# Altium PCB pcb.PcbDoc (part 2 of 2)
Units mm, origin at the board's own origin, x right, y up, seen from the top; angles counter-clockwise.
Board outline 100 x 100 mm, 2 copper layers (Top Layer, Bottom Layer); 16 components, 50 nets, 301 pads, 580 vias.
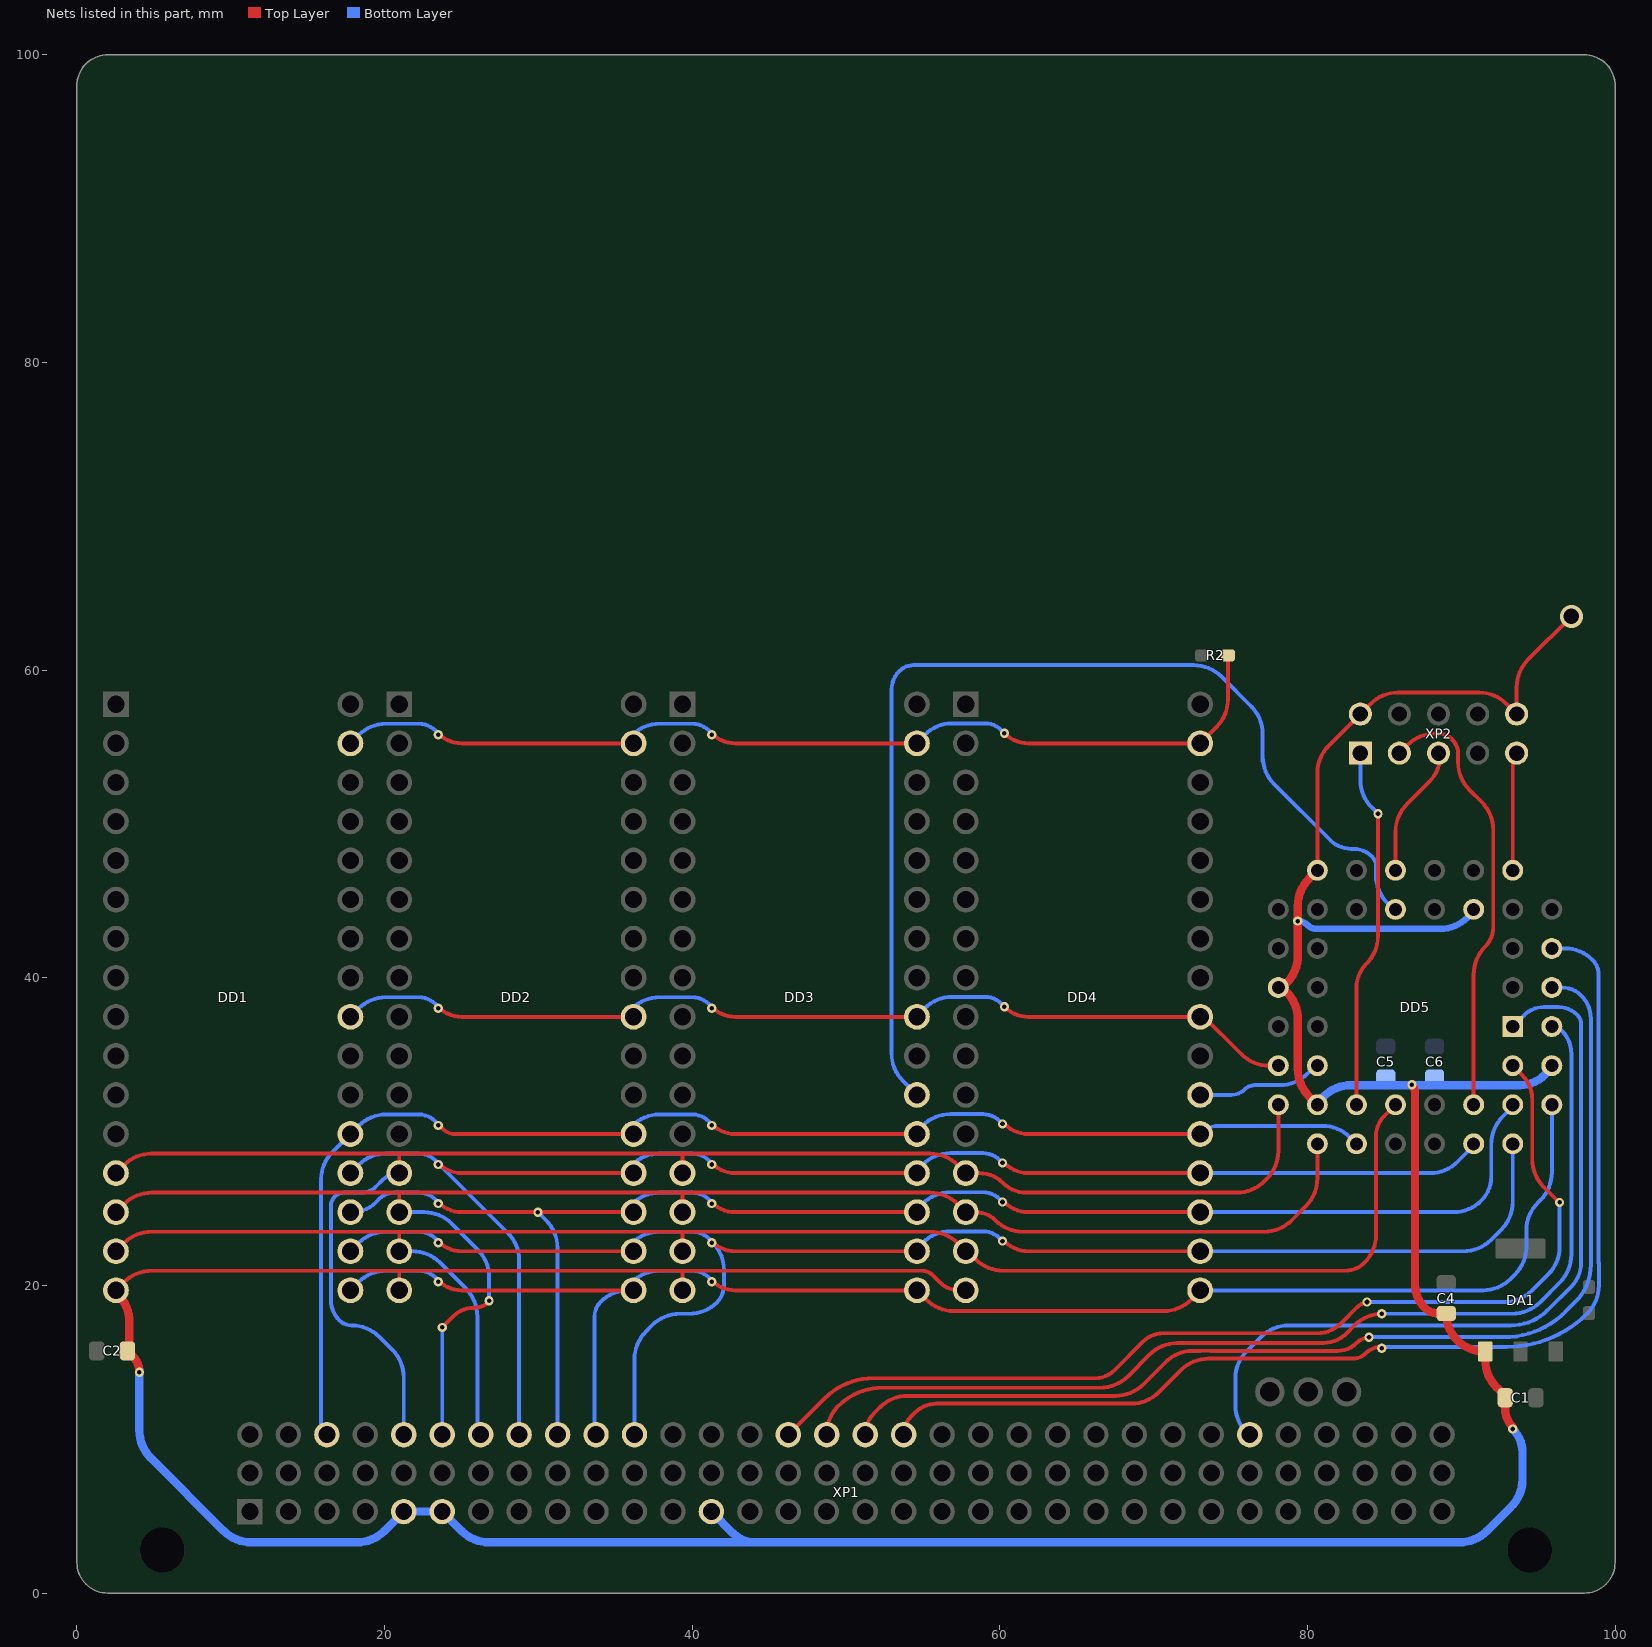
[diagram p2: the nets of this part, all layers, seen from the top]

## Via types
v1: diameter 1.5, hole 1, Top Layer to Bottom Layer, 513 vias
v2: diameter 0.6, hole 0.3, Top Layer to Bottom Layer, 67 vias

## Nets (pads, with @x,y where several pads share a name; then routed paths per layer and width w, separated by ;. In a path a pad name is that pad's centre, name@x,y a point inside that pad or via, vN(x,y) a via of type N, cw(c..) or ccw(c..) an arc to the next point about the centre after c; other vN are vias at no path point) (continued)
CS2: DD3.22 DD5.14 | length 70
  Bottom Layer w0.254: DD3.22@54.61,32.385 53.703,33.292 cw(c55.499,35.088) 52.959,35.088 52.959,58.718 cw(c54.693,58.718) 53.467,59.944 cw(c54.387,59.024) 54.387,60.325 72.608,60.325 cw(c72.608,57.785) 74.404,59.581 76.345,57.64 cw(c74.549,55.844) 77.089,55.844 77.089,54.392 ; 77.089,54.102 77.089,54.392 ; DD5.14@85.598,44.45 85.199,44.849 cw(c86.995,46.645) 84.455,46.645 84.455,47.266 ccw(c83.588,47.266) 84.201,47.879 ccw(c82.975,46.653) 82.975,48.387 82.829,48.387 cw(c82.829,50.288) 81.485,48.944 77.833,52.596 cw(c79.629,54.392) 77.089,54.392
CS3: DD4.22 DD5.27 | length 8.3
  Bottom Layer w0.254: DD4.22@73.025,32.385 75.026,32.385 ccw(c75.026,33.686) 75.946,32.766 cw(c76.559,32.153) 76.559,33.02 78.196,33.02 ccw(c78.196,35.56) 79.992,33.764 DD5.27@80.645,34.417
D0: DD1.13 DD2.13 DD3.13 DD4.13 DD5.28 XP1.C5 | length 105
  Top Layer w0.254: DD1.13@3.066,27.831 cw(c4.862,26.035) 4.862,28.575 20.955,28.575 ; DD2.13@20.955,27.305 20.955,28.575 ; DD3.13@39.37,27.305 39.37,28.575 ; DD4.13@57.259,27.831 ccw(c55.463,26.035) 55.463,28.575 39.37,28.575 ; DD4.13@57.785,27.305 58.665,27.305 cw(c58.665,25.137) 60.198,26.67 ccw(c61.731,28.203) 60.199,26.669 ccw(c61.731,28.203) 61.731,26.035 75.402,26.035 ccw(c75.402,28.575) 77.198,26.779 77.361,26.942 ccw(c75.565,28.738) 78.105,28.738 DD5.28@78.105,31.75 ; 20.955,28.575 39.37,28.575
  Bottom Layer w0.254: DD2.13@20.955,27.305 ccw(c20.955,25.772) 19.871,26.856 19.431,26.416 cw(c18.511,27.336) 18.511,26.035 17.377,26.035 ccw(c17.377,25.168) 16.764,25.781 ccw(c17.377,25.168) 16.51,25.168 16.51,19.074 ccw(c18.408,19.074) 17.066,17.732 ccw(c17.871,18.538) 17.871,17.399 cw(c17.871,14.859) 19.667,16.655 20.506,15.816 cw(c18.71,14.02) 21.25,14.02 XP1.C5@21.25,10.3
D1: DD1.14 DD2.14 DD3.14 DD4.14 DD5.29 XP1.C6 | length 104.4
  Top Layer w0.254: DD1.14@3.066,25.291 cw(c4.862,23.495) 4.862,26.035 20.955,26.035 ; DD2.14@20.955,24.765 20.955,26.035 ; v2(23.749,17.272) 24.48,18.003 cw(c25.781,16.702) 25.781,18.542 ccw(c25.781,20.075) v2@26.865,18.991 ; DD3.14@39.37,24.765 39.37,26.035 ; DD4.14@57.259,25.291 ccw(c55.463,23.495) 55.463,26.035 39.37,26.035 ; DD4.14@57.785,24.765 58.438,24.765 cw(c58.438,22.969) 59.708,24.239 ccw(c61.504,26.035) 61.504,23.495 77.18,23.495 ccw(c77.18,26.035) 78.976,24.239 79.901,25.164 ccw(c78.105,26.96) 80.645,26.96 DD5.29@80.645,29.21 ; 20.955,26.035 39.37,26.035
  Bottom Layer w0.254: DD2.14@20.955,24.765 22.57,24.765 cw(c22.57,22.225) 24.366,24.021 26.053,22.334 cw(c24.257,20.538) 26.797,20.538 v2@26.797,19.177 ; v2(23.749,17.272) 23.75,17.271 XP1.C6@23.75,10.3
  other v2: 26.797,18.999
D2: DD1.15 DD2.15 DD3.15 DD4.15 DD5.34 XP1.C7 | length 109.6
  Top Layer w0.254: DD1.15@3.066,22.751 cw(c4.862,20.955) 4.862,23.495 20.955,23.495 ; DD2.15@20.955,22.225 20.955,23.495 ; DD3.15@39.37,22.225 39.37,23.495 ; DD4.15@57.259,22.751 ccw(c55.463,20.955) 55.463,23.495 39.37,23.495 ; DD4.15@57.785,22.352 58.438,21.699 ccw(c60.234,23.495) 60.234,20.955 82.441,20.955 ccw(c82.441,22.751) 83.711,21.481 ccw(c81.915,23.277) 84.455,23.277 84.455,29.718 cw(c86.295,29.718) 84.994,31.019 DD5.34@85.725,31.75 ; 20.955,23.495 39.37,23.495
  Bottom Layer w0.254: DD2.15@20.955,22.225 21.808,22.225 cw(c21.808,19.685) 23.604,21.481 25.291,19.794 cw(c23.495,17.998) 26.035,17.998 XP1.C7@26.035,10.16
D3: DD1.17 DD2.17 DD3.17 DD4.17 DD5.40 XP1.C10 | length 99.3
  Top Layer w0.254: v2@23.495,20.32 ccw(c25.028,21.853) 25.028,19.685 DD2.17@36.195,19.685 ; v2@41.275,20.32 ccw(c42.808,21.853) 42.808,19.685 DD3.17@53.975,19.685 ; DD3.17@54.61,19.685 55.212,19.083 ccw(c57.008,20.879) 57.008,18.339 70.652,18.339 ccw(c70.652,20.879) 72.448,19.083 DD4.17@73.076,19.71
  Bottom Layer w0.254: DD1.17@18.306,20.211 cw(c20.102,18.415) 20.102,20.955 22.225,20.955 cw(c22.225,19.422) 23.309,20.506 ; XP1.C10@33.655,10.287 33.655,17.978 cw(c35.017,17.978) 34.054,18.941 cw(c35.85,17.145) 35.85,19.685 DD2.17@36.195,19.685 ; DD2.17@36.086,20.211 cw(c37.882,18.415) 37.882,20.955 40.005,20.955 cw(c40.005,19.422) 41.089,20.506 ; DD4.17@73.025,19.685 91.404,19.685 ccw(c91.404,22.225) 93.2,20.429 93.49,20.719 ccw(c91.694,22.515) 94.234,22.515 94.234,23.586 cw(c96.774,23.586) 94.978,25.382 95.141,25.545 ccw(c93.345,27.341) 95.885,27.341 DD5.40@95.885,31.75
  other v2: 23.495,20.244 41.275,20.244
D4: DD1.18 DD2.18 DD3.18 DD4.18 DD5.39 XP1.C11 | length 97.7
  Top Layer w0.254: v2@23.495,22.86 ccw(c25.028,24.393) 25.028,22.225 DD2.18@36.195,22.225 ; v2@41.275,22.86 ccw(c42.808,24.393) 42.808,22.225 DD3.18@53.975,22.225 ; DD3.18@54.61,22.225 DD3.18@54.777,22.225 ; v2@60.325,22.86 ccw(c61.858,24.393) 61.858,22.225 DD4.18@73.025,22.225 ; DD4.18@72.575,21.699 DD4.18@73.101,22.225
  Bottom Layer w0.254: DD1.18@18.306,22.751 cw(c20.102,20.955) 20.102,23.495 22.225,23.495 cw(c22.225,21.962) 23.309,23.046 ; DD2.18@36.086,22.751 cw(c37.882,20.955) 37.882,23.495 40.005,23.495 cw(c40.005,21.962) 41.089,23.046 ; XP1.C11@36.25,10.3 36.25,15.208 cw(c38.79,15.208) 36.994,17.004 37.407,17.417 cw(c39.203,15.621) 39.203,18.161 39.816,18.161 ccw(c39.816,20.701) 41.613,18.905 ccw(c40.527,19.991) 42.062,19.991 42.062,21.02 ccw(c39.522,21.02) 41.318,22.817 v2@41.275,22.86 ; DD3.18@54.984,22.776 cw(c56.78,20.98) 56.78,23.52 58.903,23.52 cw(c58.903,21.987) v2@59.987,23.071 ; DD4.18@73.025,22.225 90.134,22.225 ccw(c90.134,24.765) 91.93,22.969 92.601,23.64 ccw(c90.805,25.436) 93.345,25.436 DD5.39@93.345,29.21
  other v2: 23.495,22.784 41.275,22.784 60.173,22.885
D5: DD1.19 DD2.19 DD3.19 DD4.19 DD5.41 XP1.C9 | length 95.1
  Top Layer w0.254: v2@23.495,25.4 ccw(c25.028,26.933) 25.028,24.765 v2(29.972,24.765) DD2.19@36.195,24.765 ; v2@41.275,25.4 ccw(c42.808,26.933) 42.808,24.765 DD3.19@53.975,24.765 ; v2@60.325,25.4 ccw(c61.858,26.933) 61.858,24.765 DD4.19@73.025,24.765
  Bottom Layer w0.254: DD1.19@17.78,24.765 17.898,24.765 ccw(c17.898,26.933) 19.431,25.4 19.685,25.654 ; 19.685,25.654 cw(c20.605,24.734) 20.605,26.035 22.225,26.035 cw(c22.225,24.502) 23.309,25.586 ; v2(29.972,24.765) 30.498,24.239 cw(c28.702,22.443) 31.242,22.443 31.242,22.225 ; XP1.C9@31.242,10.414 31.242,22.062 ; DD2.19@36.086,25.291 cw(c37.882,23.495) 37.882,26.035 40.005,26.035 cw(c40.005,24.502) 41.089,25.586 ; DD3.19@54.984,25.316 cw(c56.78,23.52) 56.78,26.06 58.903,26.06 cw(c58.903,24.527) v2@59.987,25.611 ; DD4.19@73.025,24.765 89.499,24.765 ccw(c89.499,27.305) 91.295,25.509 ccw(c89.718,27.086) 91.948,27.086 91.948,29.174 cw(c94.488,29.174) 92.692,30.97 DD5.41@93.345,31.623
  other v2: 23.495,25.324 41.275,25.324 60.173,25.425
D6: DD1.20 DD2.20 DD3.20 DD4.20 DD5.37 XP1.C8 | length 92.7
  Top Layer w0.254: v2@23.495,27.94 ccw(c25.028,29.473) 25.028,27.305 DD2.20@36.195,27.305 ; v2@41.275,27.94 ccw(c42.808,29.473) 42.808,27.305 DD3.20@53.975,27.305 ; v2@60.325,27.94 ccw(c61.858,29.473) 61.858,27.305 DD4.20@73.025,27.305
  Bottom Layer w0.254: DD1.20@18.306,27.831 cw(c20.102,26.035) 20.102,28.575 22.225,28.575 cw(c22.225,27.042) 23.309,28.126 ; v2@23.495,27.94 28.006,23.429 cw(c26.21,21.633) 28.75,21.633 XP1.C8@28.75,10.3 ; DD2.20@36.086,27.831 cw(c37.882,26.035) 37.882,28.575 40.005,28.575 cw(c40.005,27.042) 41.089,28.126 ; DD3.20@54.984,27.856 cw(c56.78,26.06) 56.78,28.6 58.903,28.6 cw(c58.903,27.067) v2@59.987,28.151 ; DD4.20@73.025,27.305 87.975,27.305 ccw(c87.975,29.845) 89.771,28.049 DD5.37@90.805,29.083
  other v2: 23.495,27.864 41.275,27.864 60.173,27.965
D7: DD1.21 DD2.21 DD3.21 DD4.21 DD5.31 XP1.C3 | length 85.1
  Top Layer w0.254: v2@23.495,30.48 23.823,30.152 ccw(c24.564,30.892) 24.564,29.845 DD2.21@35.56,29.845 ; v2@41.275,30.48 ccw(c42.808,32.013) 42.808,29.845 DD3.21@53.975,29.845 ; v2@60.325,30.48 ccw(c61.858,32.013) 61.858,29.845 DD4.21@73.025,29.845
  Bottom Layer w0.254: XP1.C3@15.875,10.16 15.983,10.268 15.983,10.945 15.875,11.053 15.875,26.888 cw(c18.415,26.888) 16.619,28.684 DD1.21@17.78,29.845 ; DD1.21@18.306,30.371 cw(c20.102,28.575) 20.102,31.115 22.225,31.115 cw(c22.225,29.582) 23.309,30.666 ; DD2.21@36.086,30.371 cw(c37.882,28.575) 37.882,31.115 40.005,31.115 cw(c40.005,29.582) 41.089,30.666 ; DD3.21@54.984,30.396 cw(c56.78,28.6) 56.78,31.14 58.903,31.14 cw(c58.903,29.607) v2@59.987,30.691 ; DD4.21@73.025,29.87 cw(c74.251,28.644) 74.251,30.378 80.964,30.378 cw(c80.964,27.838) 82.761,29.634 DD5.31@83.185,29.21
  other v2: 23.495,30.404 41.275,30.404 60.173,30.505
GND: C1.2 C2.2 C4.2 C5.2 C6.2 DA1.1 DD1.16 DD2.16 DD3.16 DD4.16 DD5.10 DD5.17 DD5.22 DD5.30 DD5.42 XP1.A5 XP1.A6 XP1.A13 XP2.2 XP2.10 | length 269.8
  Top Layer w0.254: DD1.16@3.066,20.211 cw(c4.862,18.415) 4.862,20.955 20.955,20.955 ; DD2.16@20.955,19.685 20.955,20.955 ; DD3.16@39.37,19.685 39.37,20.955 ; DD4.16@57.785,19.685 57.371,19.685 cw(c57.371,21.506) 56.083,20.218 55.634,20.668 ccw(c54.94,19.974) 54.94,20.955 39.37,20.955 ; DD5.17@80.645,46.99 80.645,53.304 cw(c83.185,53.304) 81.389,55.1 XP2.2@83.439,57.15 84.092,57.803 cw(c85.888,56.007) 85.888,58.547 91.15,58.547 cw(c91.15,56.007) 92.946,57.803 XP2.10@93.599,57.15 93.599,58.892 cw(c96.139,58.892) 94.343,60.688 v1(97.155,63.5) ; 20.955,20.955 39.37,20.955
  Top Layer w0.54: DD1.16@2.54,19.685 2.54,19.558 2.669,19.429 cw(c0.873,17.633) 3.413,17.633 3.413,15.988 3.286,15.861 C2.2@3.286,15.748 ; C2.2@3.413,15.637 3.615,15.435 cw(c2.531,14.351) v2(4.064,14.351) ; DD5.22@78.631,39.098 cw(c76.835,37.302) 79.375,37.302 79.375,34.072 ccw(c81.915,34.072) 80.119,32.276 ; DD5.22@78.631,39.642 ccw(c76.835,41.438) 79.375,41.438 v2(79.375,43.688) 79.375,44.668 cw(c81.915,44.668) 80.119,46.464 ; v2@86.766,33.045 cw(c86.215,32.494) 86.995,32.494 86.995,20.075 ccw(c89.163,20.075) 87.63,18.542 ccw(c88.511,19.423) 88.511,18.177 C4.2@89.027,18.177 89.027,18.129 ccw(c91.403,18.129) 89.723,16.449 ccw(c91.519,18.245) 91.519,15.705 DA1.1@91.563,15.705 91.563,15.153 ccw(c94.103,15.153) 92.307,13.357 C1.2@92.837,12.827 ; C1.2@92.853,12.7 92.853,11.983 ccw(c94.533,11.983) v2@93.345,10.795
  Bottom Layer w0.254: DD5.22@78.631,39.098 78.359,39.37 DD5.22@78.631,39.642
  Bottom Layer w0.42: v2(79.375,43.688) cw(c79.375,42.768) 80.025,43.419 ccw(c80.601,43.995) 80.601,43.18 88.61,43.18 ccw(c88.61,45.72) 90.406,43.924 DD5.10@90.805,44.323
  Bottom Layer w0.54: v2(4.064,14.351) 4.064,10.577 ccw(c6.604,10.577) 4.808,8.781 9.543,4.046 ccw(c11.339,5.842) 11.339,3.302 18.2,3.302 ccw(c18.2,5.842) 19.996,4.046 XP1.A5@21.25,5.3 23.632,5.3 cw(c23.632,5.243) XP1.A6@23.673,5.283 ; XP1.A6@23.75,5.3 25.004,4.046 ccw(c26.8,5.842) 26.8,3.302 28.194,3.302 ; 28.197,3.302 44.069,3.302 ; XP1.A13@41.25,5.3 42.667,3.883 ccw(c44.069,5.284) 44.069,3.302 ; DD5.30@80.645,31.877 81.044,32.276 cw(c82.84,30.48) 82.84,33.02 93.817,33.02 ccw(c93.817,35.253) 95.396,33.674 DD5.42@95.885,34.163 ; v2@93.351,10.662 cw(c91.834,9.144) 93.98,9.144 93.98,7.402 cw(c91.44,7.402) 93.236,5.606 91.676,4.046 cw(c89.88,5.842) 89.88,3.302 44.069,3.302
  other v2: 93.345,10.668 86.792,33.045
IORQ: DD5.44 XP1.C16 | length 69.1
  Top Layer w0.254: XP1.C16@48.75,10.3 48.75,10.36 cw(c51.29,10.36) 49.494,12.156 cw(c52.376,9.274) 52.376,13.35 66.527,13.35 ccw(c66.527,15.89) 68.323,14.094 69.741,15.512 cw(c71.537,13.716) 71.537,16.256 72.216,16.256 72.23,16.271 81.053,16.271 ccw(c81.053,18.388) 82.549,16.89 83.076,17.417 cw(c84.872,15.621) 84.872,18.161 v2(84.836,18.161)
  Bottom Layer w0.254: v2(84.836,18.161) 93.309,18.161 ccw(c93.309,20.701) 95.105,18.905 96.411,20.211 ccw(c94.615,22.007) 97.155,22.007 97.155,35.065 ccw(c95.04,35.065) 96.535,36.561 ccw(c95.885,35.91) DD5.44@95.885,36.83
MREQ: DD5.43 XP1.C15 | length 68
  Top Layer w0.254: XP1.C15@46.25,10.3 48.604,12.654 cw(c51.781,9.476) 51.781,13.97 66.211,13.97 ccw(c66.211,15.704) 67.437,14.478 69.311,16.352 cw(c70.612,15.051) 70.612,16.891 80.636,16.891 ccw(c80.636,19.059) 82.169,17.526 83.225,18.582 cw(c84.049,17.758) v2@84.049,18.923 ; DD5.43@93.345,34.29 93.95,33.685 cw(c92.346,32.08) 94.615,32.08 94.615,28.205 ccw(c97.155,28.205) 95.359,26.409 v2@96.368,25.4
  Bottom Layer w0.254: v2@84.023,18.923 92.801,18.923 ccw(c92.801,21.463) 94.597,19.667 95.649,20.719 ccw(c93.853,22.515) 96.393,22.515 v2(96.393,25.4)
  other v2: 83.871,18.923
OE: DD1.24 DD2.24 DD3.24 DD4.24 DD5.26 | length 60.8
  Top Layer w0.254: v2@23.495,38.1 ccw(c25.028,39.633) 25.028,37.465 DD2.24@36.195,37.465 ; v2@41.275,38.1 ccw(c42.808,39.633) 42.808,37.465 DD3.24@53.975,37.465 ; v2@60.325,38.1 ccw(c61.858,39.633) 61.858,37.465 DD4.24@73.025,37.465 ; DD4.24@73.152,37.592 75.71,35.034 ccw(c77.506,36.83) 77.506,34.29 DD5.26@78.105,34.29
  Bottom Layer w0.254: DD1.24@18.306,37.991 cw(c20.102,36.195) 20.102,38.735 22.225,38.735 cw(c22.225,37.202) 23.309,38.286 ; DD2.24@36.086,37.991 cw(c37.882,36.195) 37.882,38.735 40.005,38.735 cw(c40.005,37.202) 41.089,38.286 ; DD3.24@55.111,38.016 cw(c56.907,36.22) 56.907,38.76 59.03,38.76 cw(c59.03,37.227) v2@60.114,38.311
  other v2: 23.495,38.024 41.275,38.024 60.3,38.125
RD: DD5.2 XP1.C17 | length 71.7
  Top Layer w0.254: XP1.C17@51.25,10.3 cw(c53.225,10.3) 51.828,11.696 52.215,12.083 cw(c54.011,10.287) 54.011,12.827 ; 53.975,12.827 67.528,12.827 ccw(c67.528,15.367) 69.324,13.571 70.757,15.004 cw(c72.553,13.208) 72.553,15.748 73.016,15.748 73.026,15.758 73.728,15.758 73.738,15.748 81.959,15.748 ccw(c81.959,17.482) 83.185,16.256 cw(c84.105,15.336) v2@84.105,16.637
  Bottom Layer w0.254: 84.328,16.637 92.77,16.637 ccw(c92.77,22.318) 96.787,18.301 97.437,18.951 ccw(c95.052,21.336) 98.425,21.336 98.425,37.329 ccw(c96.257,37.329) 97.79,38.862 ccw(c96.564,37.636) 96.564,39.37 DD5.2@95.885,39.37
  other v2: 83.998,16.637
RES: DD5.1 XP1.C27 | length 51.2
  Bottom Layer w0.254: XP1.C27@76.2,10.287 76.055,10.432 cw(c77.851,12.228) 75.311,12.228 75.311,13.97 cw(c77.764,13.97) 76.029,15.704 76.98,16.655 cw(c78.776,14.859) 78.776,17.399 93.211,17.399 ccw(c93.211,20.787) 95.607,18.391 97.155,19.939 ccw(c95.622,21.472) 97.79,21.472 97.79,36.979 ccw(c96.923,36.979) 97.536,37.592 ccw(c96.31,36.366) 96.31,38.1 95.377,38.1 ccw(c95.377,36.26) 94.076,37.561 DD5.1@93.345,36.83
TCK: DD5.32 XP2.1 | length 23.6
  Top Layer w0.254: DD5.32@83.185,31.75 83.185,39.361 cw(c85.353,39.361) 83.82,40.894 83.838,40.912 ccw(c82.042,42.708) 84.582,42.708 v2(84.582,50.673)
  Bottom Layer w0.254: XP2.1@83.439,54.61 83.439,52.868 ccw(c85.979,52.868) 84.183,51.072 v2(84.582,50.673)
TDI: DD5.7 XP2.9 | length 7.8
  Top Layer w0.254: DD5.7@93.345,46.99 93.345,54.124 cw(c94.212,54.124) XP2.9@93.599,54.737
TDO: DD5.38 XP2.3 | length 28.9
  Top Layer w0.254: XP2.3@85.979,54.61 86.505,55.136 cw(c88.301,53.34) 88.301,55.88 88.519,55.88 cw(c88.519,54.654) 89.386,55.521 89.408,55.499 ; 89.408,55.499 cw(c88.488,54.579) 89.789,54.579 89.789,54.011 ccw(c92.329,54.011) 90.533,52.215 91.331,51.417 cw(c89.535,49.621) 92.075,49.621 92.075,43.289 cw(c90.279,43.289) 91.549,42.019 ccw(c93.345,40.223) 90.805,40.223 DD5.38@90.805,31.75
TMS: DD5.13 XP2.5 | length 8.7
  Top Layer w0.254: DD5.13@85.725,46.99 85.725,49.494 cw(c88.265,49.494) 86.469,51.29 87.902,52.723 ccw(c86.106,54.519) 88.646,54.519 XP2.5@88.646,54.737
WE: DD1.31 DD2.31 DD3.31 DD4.31 R2.1 | length 60.9
  Top Layer w0.254: v2@23.495,55.88 ccw(c25.028,57.413) 25.028,55.245 DD2.31@36.195,55.245 ; v2@41.275,55.88 ccw(c42.808,57.413) 42.808,55.245 DD3.31@53.975,55.245 ; v2@60.325,55.88 ccw(c61.858,57.413) 61.858,55.245 DD4.31@73.025,55.245 74.084,56.304 ccw(c72.288,58.101) 74.828,58.101 R2.1@74.828,60.935
  Bottom Layer w0.254: DD1.31@18.306,55.771 cw(c20.102,53.975) 20.102,56.515 22.225,56.515 cw(c22.225,54.982) 23.309,56.066 ; DD2.31@36.086,55.771 cw(c37.882,53.975) 37.882,56.515 40.005,56.515 cw(c40.005,54.982) 41.089,56.066 ; DD3.31@55.111,55.796 cw(c56.907,54) 56.907,56.54 59.03,56.54 cw(c59.03,55.007) v2@60.114,56.091
  other v2: 23.495,55.804 41.275,55.804 60.3,55.905
WR: DD5.4 XP1.C18 | length 73.5
  Top Layer w0.254: XP1.C18@53.746,10.312 cw(c55.402,10.312) 54.231,11.483 54.483,11.735 cw(c55.893,10.324) 55.893,12.319 68.544,12.319 ccw(c68.544,14.859) 70.34,13.063 71.773,14.496 cw(c73.569,12.7) 73.569,15.24 82.922,15.24 ccw(c82.922,16.488) 83.805,15.606 cw(c84.762,14.649) 84.762,16.002 v2@84.836,16.002
  Bottom Layer w0.254: v2@84.836,16.002 92.933,16.002 ccw(c92.933,23.435) 98.171,18.161 ; DD5.4@95.885,41.91 96.738,41.91 cw(c96.738,39.37) 98.534,41.166 cw(c97.571,40.203) 98.933,40.203 98.933,21.463 ; 98.189,18.179 cw(c92.933,23.435) 98.171,18.161 ; 98.943,21.463 98.943,19.985 cw(c96.403,19.985) 98.199,18.189 98.171,18.161
  other v2: 84.836,15.926
pads on no net: DD5.5 DD5.36 XP1. XP1.A4 XP1.A7 XP1.A12 XP1.A14 XP1.A17 XP1.A18 XP1.A19 XP1.A25 XP1.A28 XP1.A29 XP1.A30 XP1.A31 XP1.A32 XP1.B1 XP1.B2 XP1.B3 XP1.B4 XP1.B5 XP1.B6 XP1.B7 XP1.B8 XP1.B9 XP1.B10 XP1.B11 XP1.B12 XP1.B13 XP1.B14 XP1.B15 XP1.B16 XP1.B17 XP1.B18 XP1.B19 XP1.B20 XP1.B21 XP1.B22 XP1.B23 XP1.B24 XP1.B25 XP1.B26 XP1.B27 XP1.B28 XP1.B29 XP1.B30 XP1.B31 XP1.B32 XP1.C4 XP1.C12 XP1.C13 XP1.C14 XP1.C19 XP1.C20 XP1.C21 XP1.C22 XP1.C23 XP1.C24 XP1.C28 XP1.C29 XP1.C30 XP1.C31 XP1.C32 XP2.6 XP2.7 XP2.8
copper on no net:
  other v1: 6.883,13.411 18.44,13.411 87.681,13.411 75.895,18.263 7.01,32.36 28.397,32.36 48.108,32.36 66.65,32.36 86.36,41.275 3.175,63.5 5.715,63.5 81.915,63.5 84.455,63.5 86.995,63.5 89.535,63.5 92.075,63.5 94.615,63.5 3.175,66.04 5.715,66.04 8.255,66.04 10.795,66.04 13.335,66.04 15.875,66.04 18.415,66.04 20.955,66.04 23.495,66.04 26.035,66.04 28.575,66.04 31.115,66.04 33.655,66.04 36.195,66.04 38.735,66.04 41.275,66.04 43.815,66.04 46.355,66.04 48.895,66.04 51.435,66.04 53.975,66.04 56.515,66.04 59.055,66.04 61.595,66.04 64.135,66.04 66.675,66.04 69.215,66.04 71.755,66.04 74.295,66.04 76.835,66.04 79.375,66.04 81.915,66.04 84.455,66.04 86.995,66.04 89.535,66.04 92.075,66.04 94.615,66.04 97.155,66.04 3.175,68.58 5.715,68.58 8.255,68.58 10.795,68.58 13.335,68.58 15.875,68.58 18.415,68.58 20.955,68.58 23.495,68.58 26.035,68.58 28.575,68.58 31.115,68.58 33.655,68.58 36.195,68.58 38.735,68.58 41.275,68.58 43.815,68.58 46.355,68.58 48.895,68.58 51.435,68.58 53.975,68.58 56.515,68.58 59.055,68.58 61.595,68.58 64.135,68.58 66.675,68.58 69.215,68.58 71.755,68.58 74.295,68.58 76.835,68.58 79.375,68.58 81.915,68.58 84.455,68.58 86.995,68.58 89.535,68.58 92.075,68.58 94.615,68.58 97.155,68.58 3.175,71.12 5.715,71.12 8.255,71.12 10.795,71.12 13.335,71.12 15.875,71.12 18.415,71.12 20.955,71.12 23.495,71.12 26.035,71.12 28.575,71.12 31.115,71.12 33.655,71.12 36.195,71.12 38.735,71.12 41.275,71.12 43.815,71.12 46.355,71.12 48.895,71.12 51.435,71.12 53.975,71.12 56.515,71.12 59.055,71.12 61.595,71.12 64.135,71.12 66.675,71.12 69.215,71.12 71.755,71.12 74.295,71.12 76.835,71.12 79.375,71.12 81.915,71.12 84.455,71.12 86.995,71.12 89.535,71.12 92.075,71.12 94.615,71.12 97.155,71.12 3.175,73.66 5.715,73.66 8.255,73.66 10.795,73.66 13.335,73.66 15.875,73.66 18.415,73.66 20.955,73.66 23.495,73.66 26.035,73.66 28.575,73.66 31.115,73.66 33.655,73.66 36.195,73.66 38.735,73.66 41.275,73.66 43.815,73.66 46.355,73.66 48.895,73.66 51.435,73.66 53.975,73.66 56.515,73.66 59.055,73.66 61.595,73.66 64.135,73.66 66.675,73.66 69.215,73.66 71.755,73.66 74.295,73.66 76.835,73.66 79.375,73.66 81.915,73.66 84.455,73.66 86.995,73.66 89.535,73.66 92.075,73.66 94.615,73.66 97.155,73.66 3.175,76.2 5.715,76.2 8.255,76.2 10.795,76.2 13.335,76.2 15.875,76.2 18.415,76.2 20.955,76.2 23.495,76.2 26.035,76.2 28.575,76.2 31.115,76.2 33.655,76.2 36.195,76.2 38.735,76.2 41.275,76.2 43.815,76.2 46.355,76.2 48.895,76.2 51.435,76.2 53.975,76.2 56.515,76.2 59.055,76.2 61.595,76.2 64.135,76.2 66.675,76.2 69.215,76.2 71.755,76.2 74.295,76.2 76.835,76.2 79.375,76.2 81.915,76.2 84.455,76.2 86.995,76.2 89.535,76.2 92.075,76.2 94.615,76.2 97.155,76.2 3.175,78.74 5.715,78.74 8.255,78.74 10.795,78.74 13.335,78.74 15.875,78.74 18.415,78.74 20.955,78.74 23.495,78.74 26.035,78.74 28.575,78.74 31.115,78.74 33.655,78.74 36.195,78.74 38.735,78.74 41.275,78.74 43.815,78.74 46.355,78.74 48.895,78.74 51.435,78.74 53.975,78.74 56.515,78.74 59.055,78.74 61.595,78.74 64.135,78.74 66.675,78.74 69.215,78.74 71.755,78.74 74.295,78.74 76.835,78.74 79.375,78.74 81.915,78.74 84.455,78.74 86.995,78.74 89.535,78.74 92.075,78.74 94.615,78.74 97.155,78.74 3.175,81.28 5.715,81.28 8.255,81.28 10.795,81.28 13.335,81.28 15.875,81.28 18.415,81.28 20.955,81.28 23.495,81.28 26.035,81.28 28.575,81.28 31.115,81.28 33.655,81.28 36.195,81.28 38.735,81.28 41.275,81.28 43.815,81.28 46.355,81.28 48.895,81.28 51.435,81.28 53.975,81.28 56.515,81.28 59.055,81.28 61.595,81.28 64.135,81.28 66.675,81.28 69.215,81.28 71.755,81.28 74.295,81.28 76.835,81.28 79.375,81.28 81.915,81.28 84.455,81.28 86.995,81.28 89.535,81.28 92.075,81.28 94.615,81.28 97.155,81.28 3.175,83.82 5.715,83.82 8.255,83.82 10.795,83.82 13.335,83.82 15.875,83.82 18.415,83.82 20.955,83.82 23.495,83.82 26.035,83.82 28.575,83.82 31.115,83.82 33.655,83.82 36.195,83.82 38.735,83.82 41.275,83.82 43.815,83.82 46.355,83.82 48.895,83.82 51.435,83.82 53.975,83.82 56.515,83.82 59.055,83.82 61.595,83.82 64.135,83.82 66.675,83.82 69.215,83.82 71.755,83.82 74.295,83.82 76.835,83.82 79.375,83.82 81.915,83.82 84.455,83.82 86.995,83.82 89.535,83.82 92.075,83.82 94.615,83.82 97.155,83.82 3.175,86.36 5.715,86.36 8.255,86.36 10.795,86.36 13.335,86.36 15.875,86.36 18.415,86.36 20.955,86.36 23.495,86.36 26.035,86.36 28.575,86.36 31.115,86.36 33.655,86.36 36.195,86.36 38.735,86.36 41.275,86.36 43.815,86.36 46.355,86.36 48.895,86.36 51.435,86.36 53.975,86.36 56.515,86.36 59.055,86.36 61.595,86.36 64.135,86.36 66.675,86.36 69.215,86.36 71.755,86.36 74.295,86.36 76.835,86.36 79.375,86.36 81.915,86.36 84.455,86.36 86.995,86.36 89.535,86.36 92.075,86.36 94.615,86.36 97.155,86.36 3.175,88.9 5.715,88.9 8.255,88.9 10.795,88.9 13.335,88.9 15.875,88.9 18.415,88.9 20.955,88.9 23.495,88.9 26.035,88.9 28.575,88.9 31.115,88.9 33.655,88.9 36.195,88.9 38.735,88.9 41.275,88.9 43.815,88.9 46.355,88.9 48.895,88.9 51.435,88.9 53.975,88.9 56.515,88.9 59.055,88.9 61.595,88.9 64.135,88.9 66.675,88.9 69.215,88.9 71.755,88.9 74.295,88.9 76.835,88.9 79.375,88.9 81.915,88.9 84.455,88.9 86.995,88.9 89.535,88.9 92.075,88.9 94.615,88.9 97.155,88.9 3.175,91.44 5.715,91.44 8.255,91.44 10.795,91.44 13.335,91.44 15.875,91.44 18.415,91.44 20.955,91.44 23.495,91.44 26.035,91.44 28.575,91.44 31.115,91.44 33.655,91.44 36.195,91.44 38.735,91.44 41.275,91.44 43.815,91.44 46.355,91.44 48.895,91.44 51.435,91.44 53.975,91.44 56.515,91.44 59.055,91.44 61.595,91.44 64.135,91.44 66.675,91.44 69.215,91.44 71.755,91.44 74.295,91.44 76.835,91.44 79.375,91.44 81.915,91.44 84.455,91.44 86.995,91.44 89.535,91.44 92.075,91.44 94.615,91.44 97.155,91.44 3.175,93.98 5.715,93.98 8.255,93.98 10.795,93.98 13.335,93.98 15.875,93.98 18.415,93.98 20.955,93.98 23.495,93.98 26.035,93.98 28.575,93.98 31.115,93.98 33.655,93.98 36.195,93.98 38.735,93.98 41.275,93.98 43.815,93.98 46.355,93.98 48.895,93.98 51.435,93.98 53.975,93.98 56.515,93.98 59.055,93.98 61.595,93.98 64.135,93.98 66.675,93.98 69.215,93.98 71.755,93.98 74.295,93.98 76.835,93.98 79.375,93.98 81.915,93.98 84.455,93.98 86.995,93.98 89.535,93.98 92.075,93.98 94.615,93.98 97.155,93.98 3.175,96.52 5.715,96.52 8.255,96.52 10.795,96.52 13.335,96.52 15.875,96.52 18.415,96.52 20.955,96.52 23.495,96.52 26.035,96.52 28.575,96.52 31.115,96.52 33.655,96.52 36.195,96.52 38.735,96.52 41.275,96.52 43.815,96.52 46.355,96.52 48.895,96.52 51.435,96.52 53.975,96.52 56.515,96.52 59.055,96.52 61.595,96.52 64.135,96.52 66.675,96.52 69.215,96.52 71.755,96.52 74.295,96.52 76.835,96.52 79.375,96.52 81.915,96.52 84.455,96.52 86.995,96.52 89.535,96.52 92.075,96.52 94.615,96.52 97.155,96.52

## Silkscreen, mask and mechanical layers (free items; w line width, h text height)
Top Overlay:
  lines w0.254: 76.581,14.605 83.515,14.605
  text "Delta Cartridge 2M" at 38.125,13.487 h4
Bottom Overlay:
  circle w0.254: c88.265,31.75 r0.991
  circle w0.254: c93.345,41.91 r0.991
  text "https://zxgit.org/MichaelKaa/zx_cartridge" at 62.128,61.798 h4
  text "GND" at 82.652,58.623 h3 r270
  text "VCC" at 85.192,58.623 h3 r270
  text "GND" at 92.812,58.623 h3 r270
  text "TDI" at 92.786,50.343 h3 r270
  text "TCK" at 82.652,50.013 h3 r270
  text "TDO" at 85.166,50.013 h3 r270
  text "TMS" at 87.681,50.013 h3 r270
  text "MKaa 22.02.2026" at 97.307,21.234 h4
  text "A15" at 10.389,12.065 h3 r270
  text "A13" at 12.979,12.065 h3 r270
  text "D7" at 15.291,12.065 h3 r270
  text "D0" at 20.447,12.065 h3 r270
  text "D1" at 22.936,12.065 h3 r270
  text "D2" at 25.375,12.065 h3 r270
  text "D6" at 27.94,12.065 h3 r270
  text "D5" at 30.378,12.065 h3 r270
  text "D3" at 32.868,12.065 h3 r270
  text "D4" at 35.331,12.065 h3 r270
  text "INT" at 37.973,12.065 h3 r270
  text "NMI" at 40.437,12.065 h3 r270
  text "HALT" at 42.951,12.065 h3 r270
  text "MREQ" at 45.517,12.065 h3 r270
  text "IORQ" at 48.108,12.065 h3 r270
  text "RD" at 50.47,12.065 h3 r270
  text "WR" at 52.934,12.065 h3 r270
  text "WAIT" at 57.963,12.065 h3 r270
  text "M1" at 65.481,12.065 h3 r270
  text "RFSH" at 67.97,12.065 h3 r270
  text "A8" at 70.409,12.065 h3 r270
  text "A10" at 72.974,12.065 h3 r270
  text "A14" at 10.465,0.584 h3 r270
  text "A12" at 12.979,0.584 h3 r270
  text "+5V" at 15.469,0.584 h3 r270
  text "GND" at 20.447,0.584 h3 r270
  text "GND" at 22.936,0.584 h3 r270
  text "CPM" at 25.451,0.584 h3 r270
  text "A0" at 27.965,0.584 h3 r270
  text "A1" at 30.48,0.584 h3 r270
  text "A2" at 33.02,0.584 h3 r270
  text "A3" at 35.458,0.584 h3 r270
  text "GND" at 40.462,0.584 h3 r270
  text "+5V" at 45.466,0.584 h3 r270
  text "+5V" at 47.955,0.584 h3 r270
  text "A7" at 57.988,0.584 h3 r270
  text "A6" at 60.503,0.584 h3 r270
  text "A5" at 62.941,0.584 h3 r270
  text "A4" at 65.456,0.584 h3 r270
  text "BLK" at 67.945,0.584 h3 r270
  text "BSK" at 70.434,0.584 h3 r270
  text "A9" at 73,0.584 h3 r270
  text "A11" at 75.489,0.584 h3 r270
  text "R14" at 77.978,0.584 h3 r270

## Text inside footprints (layer, text, board x,y; h text height)
XP1: Mechanical 13 "PCB Edge" at 97.5,0.3 h0.81